# Altium PCB PCB2.PcbDoc (part 3 of 4)
Units mm, origin at the board's own origin, x right, y up, seen from the top; angles counter-clockwise.
Board outline 94 x 91 mm, 2 copper layers (Top Layer, Bottom Layer); 387 components, 398 nets, 1559 pads, 0 vias.
Unrouted connection lines stored in the file: 857.
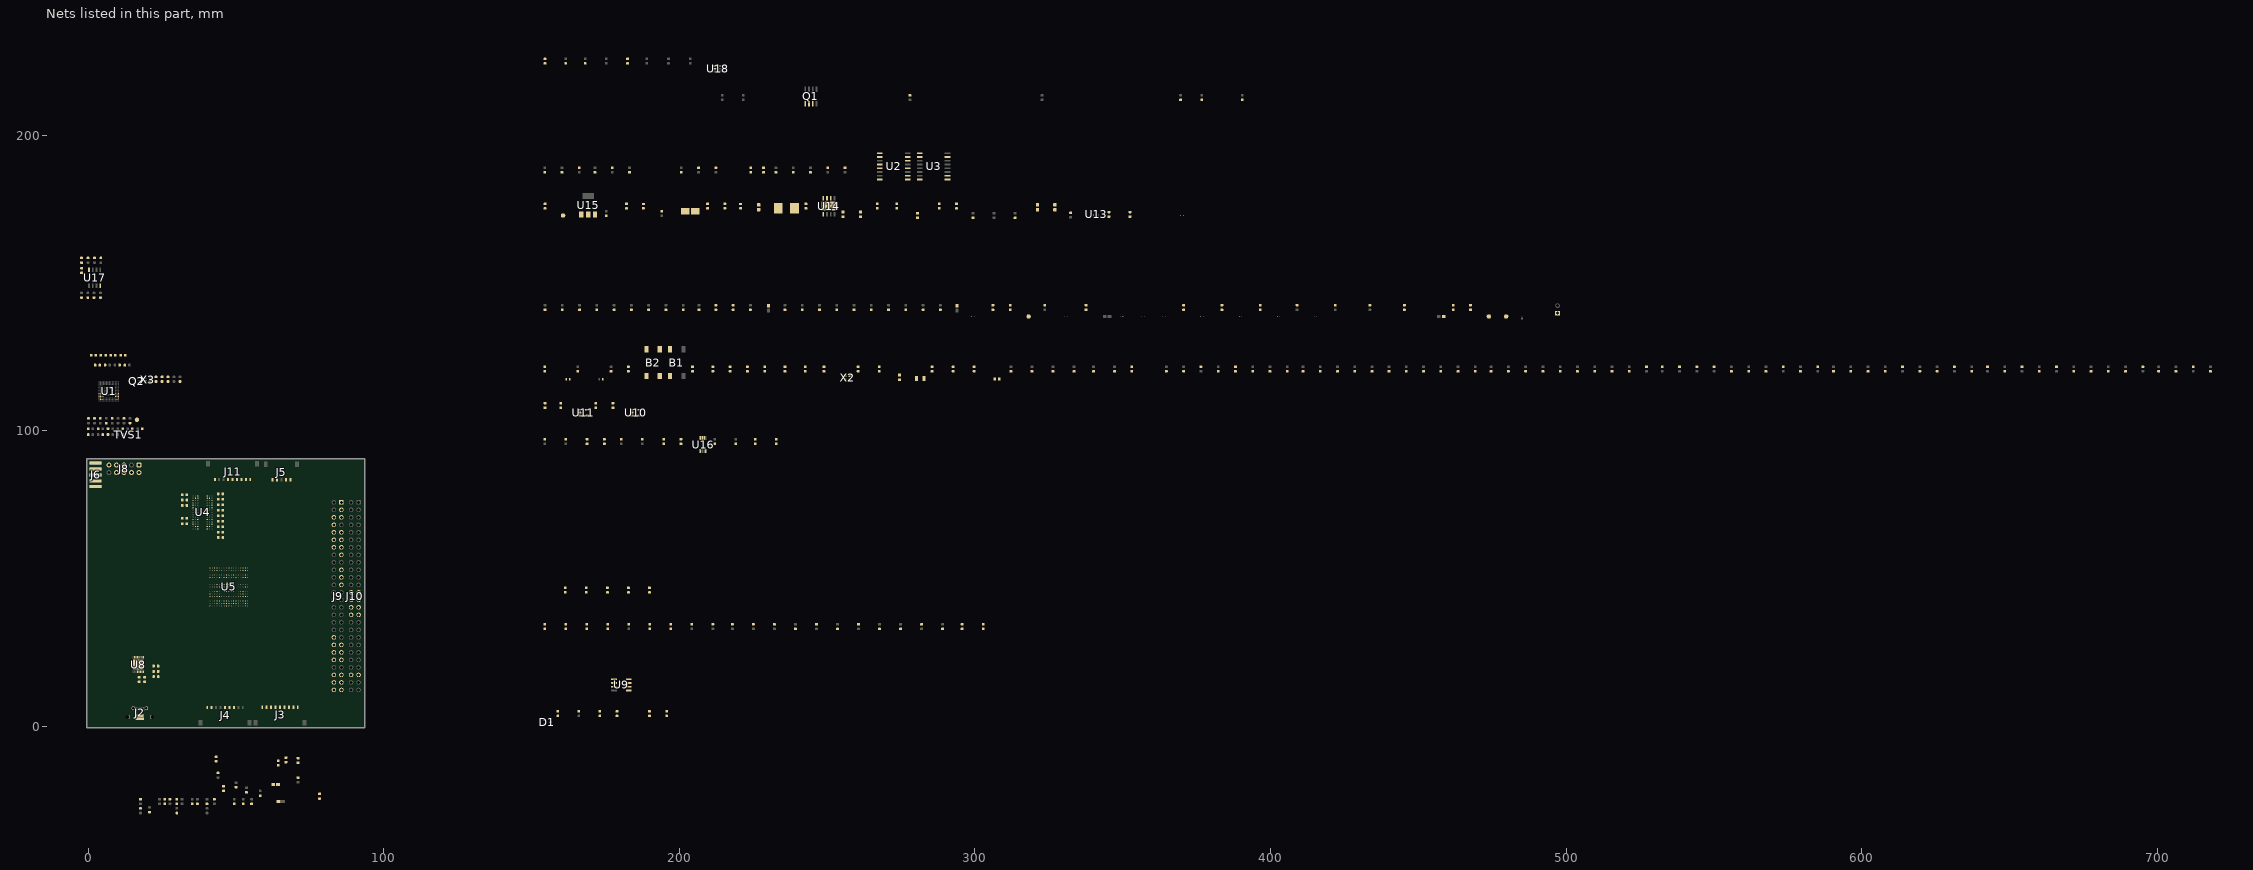
[diagram p2: the nets of this part, all layers, seen from the top]

## Part data (continued)
R1 R2 R3 R4 R5 R6 R7 R8 R17 R22: library part MCD-00063, "Resistor,47K,0402,1%,1/16W", Manufacturer=YAGEO, Manufacturer_Part_Number=RC0402FR-0747KL, Package=0402, Component_Country_Of_Origin=China, ComponentLink1Description=Yageo_Resistor_RC0402-series.pdf, ComponentLink1URL=http://tunmcdsvn.tun.st.com/Component_Documentation_Library/Trunk/Resistor/YAGEO_RC_L_Series, ECCN_EU=n/a, ECCN_US=n/a, ID=2528, Initial_Board_Reference=MB1274, Internal_Part_Number=MCD-00063, Order_Code_Digikey=311-47.0KLRCT-ND, Order_Code_Farnell=9239430, Order_Code_RS=9239430, Part_Preference=Recommended, Part_Type=Resistor, Provided_By=Subcon, ShowFields=YES, Status=Released
R9 R10 R11 R12 R13 R14 R15 R16 R20 R21 R165 R166 R167 R168 R169: library part MCD-00189, "Resistor,22R,0402,1%,1/16W", Manufacturer=YAGEO, Manufacturer_Part_Number=RC0402FR-0722RL, Package=0402, Component_Country_Of_Origin=China, ComponentLink1Description=Yageo_Resistor_RC0402-series.pdf, ComponentLink1URL=http://tunmcdsvn.tun.st.com/Component_Documentation_Library/Trunk/Resistor/YAGEO_RC_L_Series, ECCN_EU=n/a, ECCN_US=n/a, ID=2677, Internal_Part_Number=MCD-00189, Order_Code_Digikey=311-22.0LRCT-ND, Order_Code_Farnell=9239030, Order_Code_RS=N/A, Part_Preference=Recommended, Part_Type=Resistor, Provided_By=Subcon, ShowFields=YES, Status=Released
R18 R35 R36: library part MCD-00053, "Resistor,10K,0402,1%,1/16W", Manufacturer=YAGEO, Manufacturer_Part_Number=RC0402FR-0710KL, Package=0402, BMS_Part_Number=9131590, Component_Country_Of_Origin=China, ComponentLink1Description=Yageo_Resistor_RC0402-series.pdf, ComponentLink1URL=http://tunmcdsvn.tun.st.com/Component_Documentation_Library/Trunk/Resistor/YAGEO_RC_L_Series, ECCN_EU=n/a, ECCN_US=n/a, ID=2539, Initial_Board_Reference=MB1274, Internal_Part_Number=MCD-00053, Order_Code_Digikey=311-10.0KLRCT-ND, Order_Code_Farnell=9239359, Order_Code_RS=9239359, Part_Preference=Recommended, Part_Type=Resistor, Provided_By=subcon, ShowFields=YES, Status=Released
R19: library part MCD-00052, "Resistor,0R,0402,5%,1/16W", Manufacturer=YAGEO, Manufacturer_Part_Number=RC0402JR-070RL, Package=0402, Component_Country_Of_Origin=China, ComponentLink1Description=Yageo_Resistor_RC0402-series.pdf, ComponentLink1URL=http://tunmcdsvn.tun.st.com/Component_Documentation_Library/Trunk/Resistor/YAGEO_RC_L_Series, ECCN_EU=n/a, ECCN_US=n/a, ID=2540, Initial_Board_Reference=MB1274, Internal_Part_Number=MCD-00052, Order_Code_Digikey=311-0.0JRCT-ND, Order_Code_Farnell=9232516RL, Order_Code_RS=9232516RL, Part_Preference=Recommended, Part_Type=Resistor, Provided_By=Subcon, ShowFields=YES, Status=Released
R23 R24 R25 R26 R27 R28 R29 R30 R31 R32 R33 R34 R37 R38 R39 R40 R41 R42 R43 R44 R45 R46 R47 R48 R49 R50 R51 R52 R53 R54 R55 R56 R57 R58 R59 R60 R61 R62 R63 R64 R65 R66 R67 R68 R69 R70 R71 R72 R73 R74 R75 R76 R77 R78 R79 R80 R81 R82 R83 R84 R85 R86 R87 R88 R89 R90 R91 R92 R93 R94 R96 R98 R99 R100 R101 R102 R103 R104: library part MCD-00455, "Resistor,33R,0402,1%,1/16W", Manufacturer=YAGEO, Manufacturer_Part_Number=RC0402FR-0733RL, Package=0402, Component_Country_Of_Origin=China, ComponentLink1Description=Yageo_Resistor_RC0402-series.pdf, ComponentLink1URL=http://tunmcdsvn.tun.st.com/Component_Documentation_Library/Trunk/Resistor/YAGEO_RC_L_Series, ECCN_EU=n/a, ECCN_US=n/a, ID=2821, Internal_Part_Number=MCD-00455, Order_Code_Digikey=311-33.0LRCT-ND, Order_Code_Farnell=9239057, Order_Code_RS=N/A, Part_Preference=Recommended, Part_Type=Resistor, Provided_By=Subcon, ShowFields=YES, Status=Released
R95: library part MCD-00053, "Resistor,1K,0603,1%,1/16W", Manufacturer=YAGEO, Manufacturer_Part_Number=RC0402FR-0710KL, Package=0402, BMS_Part_Number=9131590, Component_Country_Of_Origin=China, ComponentLink1Description=Yageo_Resistor_RC0402-series.pdf, ComponentLink1URL=http://tunmcdsvn.tun.st.com/Component_Documentation_Library/Trunk/Resistor/YAGEO_RC_L_Series, ECCN_EU=n/a, ECCN_US=n/a, ID=2539, Initial_Board_Reference=MB1274, Internal_Part_Number=MCD-00053, Order_Code_Digikey=311-10.0KLRCT-ND, Order_Code_Farnell=9239359, Order_Code_RS=9239359, Part_Preference=Recommended, Part_Type=Resistor, Provided_By=subcon, ShowFields=YES, Status=Released
R97: library part MCD-00485, "Resistor,51R,0603,1%,1/16W", Manufacturer=YAGEO, Manufacturer_Part_Number=RC0402FR-0751RL, Package=0402, Component_Country_Of_Origin=China, ComponentLink1Description=Yageo_Resistor_RC0402-series.pdf, ComponentLink1URL=http://tunmcdsvn.tun.st.com/Component_Documentation_Library/Trunk/Resistor/YAGEO_RC_L_Series, ECCN_EU=n/a, ECCN_US=n/a, ID=2790, Internal_Part_Number=MCD-00485, Order_Code_Digikey=311-51.0LRCT-ND, Order_Code_Farnell=1458803, Order_Code_RS=N/A, Part_Preference=Recommended, Part_Type=Resistor, Provided_By=Subcon, ShowFields=YES, Status=Released
R105 R108 R162: library part _RES_B_2, "RES, 47R. 0603"
R106 R107 R117: library part MCD-00181, "Resistor,0R,0603,ULO", Manufacturer="ROHM SEMICONDUCTOR", Manufacturer_Part_Number=PMR03EZPJ000, Package=0603, Component_Country_Of_Origin="Philippines, Thailand°°", ComponentLink1Description="ROHM_ULtra low Ohmic Resistor _PMR10EZPJ000.pdf", ComponentLink1URL=http://tunmcdsvn.tun.st.com/Component_Documentation_Library/Trunk/Resistor/ROHM_PMR_Series, ECCN_EU=n/a, ECCN_US=n/a, ID=2691, Internal_Part_Number=MCD-00181, Order_Code_Digikey=PMR03EZPJ000-ND, Order_Code_Farnell=N/A, Order_Code_RS=N/A, Part_Preference=Recommended, Part_Type=Resistor, Provided_By=Subcon, ShowFields=YES, Status=Released
R109 R110 R111 R112 R113: library part MCD-00053, "Resistor,10K,0603,1%,1/16W", Manufacturer=YAGEO, Manufacturer_Part_Number=RC0402FR-0710KL, Package=0402, BMS_Part_Number=9131590, Component_Country_Of_Origin=China, ComponentLink1Description=Yageo_Resistor_RC0402-series.pdf, ComponentLink1URL=http://tunmcdsvn.tun.st.com/Component_Documentation_Library/Trunk/Resistor/YAGEO_RC_L_Series, ECCN_EU=n/a, ECCN_US=n/a, ID=2539, Initial_Board_Reference=MB1274, Internal_Part_Number=MCD-00053, Order_Code_Digikey=311-10.0KLRCT-ND, Order_Code_Farnell=9239359, Order_Code_RS=9239359, Part_Preference=Recommended, Part_Type=Resistor, Provided_By=subcon, ShowFields=YES, Status=Released
R114: library part MCD-00067, "Resistor, 100R, 0402, +/- 1%, 1/16W", Manufacturer=YAGEO, Manufacturer_Part_Number=RC0402FR-07100RL, Package=0402, Component_Country_Of_Origin=China, ComponentLink1URL=http://tunmcdsvn.tun.st.com/Component_Documentation_Library/Trunk/Resistor/YAGEO_RC_L_Series, ID=2527, Internal_Part_Number=MCD-00067, Order_Code_Digikey=311-100LRCT-ND, Order_Code_Farnell=9239111, Order_Code_RS=9239111, Part_Preference=Recommended, Part_Type=Resistor, ShowFields=YES, Status=Released
R115: library part MCD-00062, "Resistor,330R,0402,1%,1/16W", Manufacturer=YAGEO, Manufacturer_Part_Number=RC0402FR-07330RL, Package=0402, Component_Country_Of_Origin=China, ComponentLink1Description=Yageo_Resistor_RC0402-series.pdf, ComponentLink1URL=http://tunmcdsvn.tun.st.com/Component_Documentation_Library/Trunk/Resistor/YAGEO_RC_L_Series, ECCN_EU=n/a, ECCN_US=n/a, ID=2529, Initial_Board_Reference=MB1274, Internal_Part_Number=MCD-00062, Order_Code_Digikey=311-330LRCT-ND, Order_Code_Farnell=9239170, Order_Code_RS=9239170, Part_Preference=Recommended, Part_Type=Resistor, Provided_By=Subcon, ShowFields=YES, Status=Released
R116: library part MCD-00164, "Resistor,220K,0402,1%,1/16W", Manufacturer=YAGEO, Manufacturer_Part_Number=RC0402FR-07220KL, Package=0402, Component_Country_Of_Origin=China, ComponentLink1Description=Yageo_Resistor_RC0402-series.pdf, ComponentLink1URL=http://tunmcdsvn.tun.st.com/Component_Documentation_Library/Trunk/Resistor/YAGEO_RC_L_Series, ECCN_EU=n/a, ECCN_US=n/a, ID=2704, Initial_Board_Reference=MB1264, Internal_Part_Number=MCD-00164, Order_Code_Digikey=311-220KLRCT-ND, Order_Code_Farnell=9239510, Order_Code_RS=N/A, Part_Preference=Recommended, Part_Type=Resistor, Provided_By=Subcon, ShowFields=YES, Status=Released
R118 R119 R120: library part _RES_B_2, "RES, 0603"
R121 R122 R123 R124 R126 R127 R128 R129 R130 R131 R132 R133 R134 R135 R136 R137 R138 R139 R140 R141 R142 R143 R144 R145 R146 R147 R148 R149 R150 R151 R152: library part Res1, "Resistor", Published=8-Jun-2000, Publisher="Altium Limited", Revision="July-2002: Re-released for DXP Platform."
R125: library part Res_8K06_1%_0402, "Resistor,8K06,0402,1%,YAGEO", Manuf_1=YAGEO, Distrib=DIGIKEY, ECCN_US/EU=n/a
R153: library part Res1, "RES SMD OHM 1% 1/10W 0603", Published=8-Jun-2000, Publisher="Altium Limited", Revision="July-2002: Re-released for DXP Platform."
R154 R155 R163: library part MCD-00485, "Resistor,10k,0603,1%,1/16W", Manufacturer=YAGEO, Manufacturer_Part_Number=RC0402FR-0751RL, Package=0402, Component_Country_Of_Origin=China, ComponentLink1Description=Yageo_Resistor_RC0402-series.pdf, ComponentLink1URL=http://tunmcdsvn.tun.st.com/Component_Documentation_Library/Trunk/Resistor/YAGEO_RC_L_Series, ECCN_EU=n/a, ECCN_US=n/a, ID=2790, Internal_Part_Number=MCD-00485, Order_Code_Digikey=311-51.0LRCT-ND, Order_Code_Farnell=1458803, Order_Code_RS=N/A, Part_Preference=Recommended, Part_Type=Resistor, Provided_By=Subcon, ShowFields=YES, Status=Released
R156: library part MCD-00485, "Resistor,470k,0603,1%,1/16W", Manufacturer=YAGEO, Manufacturer_Part_Number=RC0402FR-0751RL, Package=0402, Component_Country_Of_Origin=China, ComponentLink1Description=Yageo_Resistor_RC0402-series.pdf, ComponentLink1URL=http://tunmcdsvn.tun.st.com/Component_Documentation_Library/Trunk/Resistor/YAGEO_RC_L_Series, ECCN_EU=n/a, ECCN_US=n/a, ID=2790, Internal_Part_Number=MCD-00485, Order_Code_Digikey=311-51.0LRCT-ND, Order_Code_Farnell=1458803, Order_Code_RS=N/A, Part_Preference=Recommended, Part_Type=Resistor, Provided_By=Subcon, ShowFields=YES, Status=Released
R157: library part MCD-00485, "Resistor,22R,0603,1%,1/16W", Manufacturer=YAGEO, Manufacturer_Part_Number=RC0402FR-0751RL, Package=0402, Component_Country_Of_Origin=China, ComponentLink1Description=Yageo_Resistor_RC0402-series.pdf, ComponentLink1URL=http://tunmcdsvn.tun.st.com/Component_Documentation_Library/Trunk/Resistor/YAGEO_RC_L_Series, ECCN_EU=n/a, ECCN_US=n/a, ID=2790, Internal_Part_Number=MCD-00485, Order_Code_Digikey=311-51.0LRCT-ND, Order_Code_Farnell=1458803, Order_Code_RS=N/A, Part_Preference=Recommended, Part_Type=Resistor, Provided_By=Subcon, ShowFields=YES, Status=Released
R158: library part MCD-00485, "Resistor,11k,0603,1%,1/16W", Manufacturer=YAGEO, Manufacturer_Part_Number=RC0402FR-0751RL, Package=0402, Component_Country_Of_Origin=China, ComponentLink1Description=Yageo_Resistor_RC0402-series.pdf, ComponentLink1URL=http://tunmcdsvn.tun.st.com/Component_Documentation_Library/Trunk/Resistor/YAGEO_RC_L_Series, ECCN_EU=n/a, ECCN_US=n/a, ID=2790, Internal_Part_Number=MCD-00485, Order_Code_Digikey=311-51.0LRCT-ND, Order_Code_Farnell=1458803, Order_Code_RS=N/A, Part_Preference=Recommended, Part_Type=Resistor, Provided_By=Subcon, ShowFields=YES, Status=Released
R159: library part MCD-00485, "Resistor,47k,0603,1%,1/16W", Manufacturer=YAGEO, Manufacturer_Part_Number=RC0402FR-0751RL, Package=0402, Component_Country_Of_Origin=China, ComponentLink1Description=Yageo_Resistor_RC0402-series.pdf, ComponentLink1URL=http://tunmcdsvn.tun.st.com/Component_Documentation_Library/Trunk/Resistor/YAGEO_RC_L_Series, ECCN_EU=n/a, ECCN_US=n/a, ID=2790, Internal_Part_Number=MCD-00485, Order_Code_Digikey=311-51.0LRCT-ND, Order_Code_Farnell=1458803, Order_Code_RS=N/A, Part_Preference=Recommended, Part_Type=Resistor, Provided_By=Subcon, ShowFields=YES, Status=Released
R160: library part MCD-00485, "Resistor,3.3k,0603,1%,1/16W", Manufacturer=YAGEO, Manufacturer_Part_Number=RC0402FR-0751RL, Package=0402, Component_Country_Of_Origin=China, ComponentLink1Description=Yageo_Resistor_RC0402-series.pdf, ComponentLink1URL=http://tunmcdsvn.tun.st.com/Component_Documentation_Library/Trunk/Resistor/YAGEO_RC_L_Series, ECCN_EU=n/a, ECCN_US=n/a, ID=2790, Internal_Part_Number=MCD-00485, Order_Code_Digikey=311-51.0LRCT-ND, Order_Code_Farnell=1458803, Order_Code_RS=N/A, Part_Preference=Recommended, Part_Type=Resistor, Provided_By=Subcon, ShowFields=YES, Status=Released
R161: library part _RES_B_2, "RES, 470R. 0603"
R164: library part MCD-00485, "Resistor,5.9k,0603,1%,1/16W", Manufacturer=YAGEO, Manufacturer_Part_Number=RC0402FR-0751RL, Package=0402, Component_Country_Of_Origin=China, ComponentLink1Description=Yageo_Resistor_RC0402-series.pdf, ComponentLink1URL=http://tunmcdsvn.tun.st.com/Component_Documentation_Library/Trunk/Resistor/YAGEO_RC_L_Series, ECCN_EU=n/a, ECCN_US=n/a, ID=2790, Internal_Part_Number=MCD-00485, Order_Code_Digikey=311-51.0LRCT-ND, Order_Code_Farnell=1458803, Order_Code_RS=N/A, Part_Preference=Recommended, Part_Type=Resistor, Provided_By=Subcon, ShowFields=YES, Status=Released
R170 R171 R172 R173 R174 R175 R176 R177 R178 R179 R180 R181 R182 R183 R184 R185 R186 R187 R188 R189 R190 R191 R192 R193 R194 R195 R196 R197 R198 R199 R200 R201 R202 R203 R204 R205 R206 R207 R208 R209 R210 R211 R212: library part _RES_B_2, "RES"
SB1 SB4 SB6 SB7 SB9 SB10 SB14 SB16 SB17 SB18: library part MCD-00071, "Solder Bridge ON", Manufacturer=YAGEO, Manufacturer_HQ_COO=Unknown, Manufacturer_Part_Number=RC0603JR-070RL, Package=0603, Component_Country_Of_Origin=China, ComponentLink1URL=http://tunmcdsvn.tun.st.com/Component_Documentation_Library/Trunk/Resistor/YAGEO_RC_Series, ECCN_EU=n/a, ECCN_US=n/a, ID=2521, Initial_Board_Reference=mb1274, Internal_Part_Number=MCD-00071, Order_Code_Digikey=311-0.0GRTR-ND, Order_Code_Farnell=2421846, Order_Code_RS=199-5647, Part_Preference=Recommended, Part_Type=Resistor, Provided_By=Subcon, ShowFields=YES, Status=Released
SB2 SB3 SB5 SB8 SB11 SB12 SB13 SB15 SB19: library part MCD-00072, "Solder Bridge OFF", Manufacturer=YAGEO, Manufacturer_HQ_COO=Unknown, Manufacturer_Part_Number=RC0603JR-070RL, Package=0603, Component_Country_Of_Origin=China, ComponentLink1URL=http://tunmcdsvn.tun.st.com/Component_Documentation_Library/Trunk/Resistor/YAGEO_RC_Series, ECCN_EU=n/a, ECCN_US=n/a, ID=2520, Initial_Board_Reference=mb1274, Internal_Part_Number=MCD-00072, Order_Code_Digikey=311-0.0GRTR-ND, Order_Code_Farnell=2421846, Order_Code_RS=199-5647, Part_Preference=Recommended, Part_Type=Resistor, Provided_By=n/a, ShowFields=YES, Status=Released
SB20: library part SB_OFF, ECCN_US/EU=n/a, Fitted=NO, Ordered by=Subcon, Revision="July-2002: Re-released for DXP Platform."
TP1 TP2 TP3 TP4 TP5: library part MCD-00630, "Test Point 0.3mm", Manufacturer=N/A, Manufacturer_HQ_COO=Unknown, Component_Country_Of_Origin=Unknown, ComponentLink1URL=http://tunmcdsvn.tun.st.com/Component_Documentation_Library/Trunk, ECCN_EU=n/a, ECCN_US=n/a, ID=3115, Initial_Board_Reference=MB1264, Internal_Part_Number=MCD-00630, Manufacturer_Part_Number=N/A, Order_Code_Digikey=N/A, Order_Code_Farnell=N/A, Order_Code_RS=N/A, Part_Preference=Recommended, Part_Type=Misc, Provided_By=n/a, ShowFields=YES, Status=Released
TVS1: "No Description Available", Manufacturer_Name=STMicroelectronics, Copyright="Copyright (C) 2025 Ultra Librarian. All rights reserved.", Manufacturer_Part_Number=USBULC6-2F3, RefDes=RefDes, Type=Type
U1: library part MCD-02799, "Memory, eMMC, 3V3, 4Gbit, 52MHz", Manufacturer=KIOXIA, Manufacturer_Part_Number=THGBMTG5D1LBAIL, Package=WFBGA153, Component_Country_Of_Origin=Unknown, ComponentLink1URL=http://tunmcdsvn.tun.st.com/Component_Documentation_Library/Trunk/IC/KIOXIA_THGBMTG5D1LBAIL, ID=4911, Internal_Part_Number=MCD-02799, Order_Code_Digikey=N/A, Order_Code_Farnell=N/A, Order_Code_RS=N/A, Part_Preference="Not recommended", Part_Type=IC, ShowFields=YES, Status=Released
U2 U3: library part MCD-01128, "Micron Serial NOR Flash Memory", Manufacturer=MICRON, Manufacturer_Part_Number=MT25QL512ABB8ESF-0SIT, Package=SOIC-16, BMS_Part_Number=9171976, Component_Country_Of_Origin=USA, ComponentLink1Description="Micron_NOR Flash_MT25QL512ABA8ESF-0SIT.pdf", ComponentLink1URL=http://tunmcdsvn.tun.st.com/Component_Documentation_Library/Trunk/IC/MICRON_MT25QL512ABB8ESF-0SIT, ECCN_EU=NEC, ECCN_US=3A991.B.1.A, ID=3369, Initial_Board_Reference=MB1381, Internal_Part_Number=MCD-01128, Order_Code_Digikey=557-1651-ND, Order_Code_Farnell=3549548, Order_Code_RS=N/A, Part_Preference=Recommended, Part_Type=IC, Provided_By=Subcon, ShowFields=YES, Status=Released
U4: library part MCD-04225, "Memory, SDRAM, 3V3, 128Mbit, 166MHz", Manufacturer=ISSI, Manufacturer_Part_Number=IS42S32400J-6BL, Package=TFBGA-90, Component_Country_Of_Origin=Unknown, ComponentLink1URL=http://tunmcdsvn.tun.st.com/Component_Documentation_Library/Trunk/IC/ISSI_IS42S32400J-6BL\, ID=6341, Internal_Part_Number=MCD-04225, Order_Code_Digikey=706-IS42S32400J-6BL-ND, Order_Code_Farnell=N/A, Order_Code_RS=N/A, Part_Preference=Recommended, Part_Type=IC, ShowFields=YES, Status=Checked
U5: library part MCD-01085, "32bit MCU TFBGA240+25", Manufacturer=STMICROELECTRONICS, Manufacturer_HQ_COO=EU, Manufacturer_Part_Number=STM32H745XIH6, Package=TFBGA-265, BMS_Part_Number=9175307, Component_Country_Of_Origin=Philippines, ComponentLink1Description=Datasheet, ComponentLink1URL=http://tunmcdsvn.tun.st.com/Component_Documentation_Library/Trunk/IC/STMICROELECTRONICS_STM32H745x, ID=3408, Initial_Board_Reference=MB1381, Internal_Part_Number=MCD-01085, Order_Code_Digikey=497-19502-ND, Order_Code_Farnell=3365366, Order_Code_RS=N/A, Part_Preference=Recommended, Part_Type=IC, Provided_By=STM, ShowFields=YES, Status=Checked
U6 U7: library part MCD-00251, "High power transient voltage suppressor, 7V breakdown", Manufacturer=STMICROELECTRONICS, Manufacturer_HQ_COO=EU, Manufacturer_Part_Number=ESDA7P60-1U1M, Package=QFN1610, BMS_Part_Number=9179042, Component_Country_Of_Origin=China, ComponentLink1Description=STM_ESD_ESDA7P60-1U1M.pdf, ComponentLink1URL=http://tunmcdsvn.tun.st.com/Component_Documentation_Library/Trunk/Diode/STMICROELECTRONICS_ESDA7P60-1U1M, ECCN_EU=NEC, ECCN_US=EAR99, ID=2618, Initial_Board_Reference=MB1311, Internal_Part_Number=MCD-00251, Order_Code_Digikey=497-16253-2-ND, Order_Code_Farnell=N/A, Order_Code_RS=110-6381, Part_Preference=Recommended, Part_Type=Diode, Provided_By=Subcon, ShowFields=YES, Status=Released
U8: "USB3320C,  Hi-Speed USB Host, Device or OTG PHY with ULPI Low Pin Interface", Manuf_1=MICROCHIP, Manuf_Part_1=USB3320C-EZK-TR, ECCN_US/EU=EAR99/NEC, Fitted=YES, Ordered by=Subcon
U10 U11: "Automotive LVDS Differential Driver"
U14: "5.5V to 36V Input, 3A, 500kHz Step-Down Converter", Package="HSOIC-8 Texas Instruments", Availability="In Stock", Check_prices=https://www.snapeda.com/parts/TPS5430DDAR/Texas+Instruments/view-part/?ref=eda, MF="Texas Instruments", MP=TPS5430DDAR, Price=None, Purchase-URL=https://pricing.snapeda.com/search/part/TPS5430DDAR/?ref=eda, SnapEDA_Link=https://www.snapeda.com/parts/TPS5430DDAR/Texas+Instruments/view-part/?ref=snap
U15: library part MCD-01070, "Adjustable and fixed low drop positive voltage regulator", Manufacturer=STMICROELECTRONICS, Manufacturer_HQ_COO=EU, Manufacturer_Part_Number=LD1117S18TR, Package=SOT-223, BMS_Part_Number=9176180, Component_Country_Of_Origin=China, ComponentLink1Description=STM_LDO_LD1117S18TR.pdf, ComponentLink1URL=http://tunmcdsvn.tun.st.com/Component_Documentation_Library/Trunk/IC/STMICROELECTRONICS_LD1117S18TR, ECCN_EU=NEC, ECCN_US=EAR99, ID=3422, Initial_Board_Reference=MB1381, Internal_Part_Number=MCD-01070, Order_Code_Digikey=497-7308-2-ND, Order_Code_Farnell=3367145, Order_Code_RS=686-9375, Part_Preference=Recommended, Part_Type=IC, Provided_By=Subcon, ShowFields=YES, Status=Checked
U16: "REDRIVER I2C HOTSWAP 8TSSOP"
U17: "No Description Available", Manufacturer_Name=ISSI, Copyright="Copyright (C) 2025 Ultra Librarian. All rights reserved.", Manufacturer_Part_Number=IS66WVS4M8BLL-104NLI, RefDes=RefDes, Type=Memory
U18: "OSC PROG TIMER TSOT23-6"
X1: library part CMP-200220-000010-1, "CRYSTAL 32.7680KHZ 12.5PF SMD", Case/Package=SMD/SMT, ESR (Equivalent Series Resistance)=70kR, Frequency=32.768kHz, Frequency Tolerance=20ppm, Load Capacitance=12.5pF, Max Operating Temperature=125°C, Min Operating Temperature=-40°C, Package Quantity=1000, Height=0.035inch, Length=0.126inch, Mount="Surface Mount", Number of Pins=2, Packaging="Tape and Reel", Width=0.059inch
X2: library part MCD-00597, "Oscillator 25.00Mhz, -+50PPM, 3.3V, Temp -55 to +125°C", Alternate_Manufacturer="AVX CORP/KYOCERA CORP", Alternate_Manufacturer_Part_Number=KC2520B25.0000C10E00, Manufacturer=NDK, Manufacturer_Part_Number=NZ2520SH-25MHZ-END4869C, Package=2.5x2.0mm, BMS_Part_Number=9157050, Component_Country_Of_Origin=Unknown, ComponentLink1Description=NDK_OSCILLATOR_NZ2520SB.pdf, ComponentLink1URL=http://tunmcdsvn.tun.st.com/Component_Documentation_Library/Trunk/Crystal_Oscillator/NDK_NZ2520SH_Series, ECCN_EU=n/a, ECCN_US=n/a, ID=3148, Initial_Board_Reference=MB1331, Internal_Part_Number=MCD-00597, Order_Code_Digikey=N/A, Order_Code_Farnell=N/A, Order_Code_RS=N/A, Part_Preference=Recommended, Part_Type=Crystal_Osc, Provided_By=STM, ShowFields=YES, Status=Released

## Nets (pads, with @x,y where several pads share a name; then routed paths per layer and width w, separated by ;. In a path a pad name is that pad's centre, name@x,y a point inside that pad or via, vN(x,y) a via of type N, cw(c..) or ccw(c..) an arc to the next point about the centre after c; other vN are vias at no path point)
1V8: C69.1 C94.2 TP5.1 U8.28 U8.30 U15.2
3.3V: C76.1 C77.1 U9.3
3V3: B2.1 B2.2 C1.2 C2.2 C3.2 C4.2 C7.2 C8.2 C9.2 C10.2 C11.2 C12.2 C13.2 C14.2 C15.2 C16.2 C17.2 C18.2 C19.2 C20.2 C21.2 C22.2 C26.2 C63.2 C64.2 C66.2 C70.1 C79.2 C80.2 C81.2 C82.2 C90.2 C91.2 C95.2 C96.2 C99.2 C101.2 DS1.1 DS2.1 J1.1 J6.6 J8.1 L2.2 Q1.1 Q1.2 Q1.3 R1.2 R2.2 R3.2 R4.2 R5.2 R6.2 R7.2 R8.2 R17.2 R18.2 R35.1 R36.1 R110.1 R111.1 R112.2 R114.2 R117.2 R136.2 R137.1 R140.1 R141.1 R154.2 R155.2 R162.2 R163.2 R170.1 R171.1 R172.1 R173.1 R200.2 R201.2 R202.2 SB18.1 U1.C6 U1.E6 U1.F5 U1.J10 U1.K9 U1.M4 U1.N4 U1.P3 U1.P5 U2.2 U3.2 U4.A7 U4.B2 U4.B7 U4.C9 U4.D9 U4.E1 U4.F9 U4.L1 U4.L7 U4.M9 U4.N9 U4.P2 U4.P7 U4.R7 U5.M1 U8.21 U10.1 U11.1 U15.3 U16.1 U16.8 U17.8 U18.1 X2.4 X3.3
3V3_BUS: J10.27 J10.28
3V3_SW1: J9.48
3V3_SW2: J9.50
3V3_SW3: J9.52
5V_BUS: J10.25 J10.26
5V_SW1: J9.47
5V_SW2: J9.49
5V_SW3: J9.51
12V: C83.1 C88.1 C89.2 R161.2 SB20.2 U13.6 U14.7
12V_CONN: C84.1 J5.1 J5.2 J11.1 R156.2 SB20.1 U13.5
+1V8: R149.1
AUXOFF: R154.1 U13.3
BOOT0: R109.1 R110.2 U5.E8
CAN0_H: J9.03 R179.2
CAN0_L: J9.01 R178.2
CAN_RX: U5.E16 U9.4
CAN_TX: U5.E17 U9.1
COMM_I2C4_EN: R176.2 U5.D3
COMM_I2C4_SCL: R174.2 U5.R16
COMM_I2C4_SDA: R175.2 U5.R17
DEBUG_UART_RX: J6.9 R169.1 U5.N4
DEBUG_UART_TX: J6.8 R167.1 U5.N5
eMMC_RSTn: R17.1 R19.2 U1.K5
FLT#: R155.1 R157.1 U13.4
FPGA_D0: U5.N6
FPGA_D1: U5.P6
FPGA_D2: U5.T6
FPGA_D3: U5.U6
FPGA_D4: U5.U7
FPGA_D5: U5.R12
FPGA_D6: U5.N15
FPGA_D7: U5.N14
FPGA_D8: U5.N13
FPGA_D9: U5.M14
FPGA_RefC: U5.E15
FPGA_STATUS0: U5.L14
FPGA_STATUS1: U5.K14
FPGA_STATUS2: U5.D11
FPGA_STATUS3: U5.E10
FPGA_STATUS4: U5.D10
FPGA_TxC: U5.N3
FPGA_TxC_N: J4.7
FPGA_TxC_P: J4.6
FPGA_TxD_N: J4.2
FPGA_TxD_P: J4.1
FRAM_CS: R203.1 U5.T4
FRAM_SPI6_MISO: R206.1 U5.R3
FRAM_SPI6_MOSI: R205.1 U5.R5
FRAM_SPI6_SCK: R204.1 U5.D9
GND: B1.1 B1.2 C1.1 C2.1 C3.1 C4.1 C5.1 C6.1 C7.1 C8.1 C9.1 C10.1 C11.1 C12.1 C13.1 C14.1 C15.1 C16.1 C17.1 C18.1 C19.1 C20.1 C21.1 C22.1 C23.1 C24.1 C25.1 C26.1 C28.1 C35.1 C36.1 C37.1 C38.1 C39.1 C40.1 C41.2 C42.1 C43.1 C44.1 C45.1 C46.1 C47.1 C48.1 C49.1 C50.1 C51.1 C52.2 C53.1 C54.1 C55.1 C56.1 C57.1 C58.1 C59.1 C60.1 C61.1 C62.1 C63.1 C64.1 C65.1 C66.1 C67.2 C68.1 C69.2 C70.2 C71.2 C72.2 C73.2 C74.2 C75.2 C76.2 C77.2 C78.2 C79.1 C80.1 C81.1 C82.1 C83.2 C84.2 C85.1 C86.1 C88.2 C91.1 C92.1 C93.1 C94.1 C97.1 C98.1 C100.1 C102.1 D1.3 D2.1 DS3.2 DS4.2 FB4.1 J3.5 J4.5 J5.4 J5.5 J6.10 J8.9 J10.29 J10.30 J10.31 J10.32 J10.47 J10.48 J11.2 Q2.2 R22.2 R109.2 R113.1 R116.1 R125.2 R139.2 R146.2 R147.2 R148.2 R150.2 R153.2 R159.1 R160.1 R164.1 R177.2 R211.1 R212.1 SB6.2 TP2.1 TP3.1 TVS1.B1 TVS1.B2 U1.A6 U1.C4 U1.E7 U1.G5 U1.H10 U1.J5 U1.K8 U1.N2 U1.N5 U1.P4 U1.P6 U2.10 U3.10 U4.A3 U4.B3 U4.B8 U4.C1 U4.D1 U4.E9 U4.F1 U4.L3 U4.L9 U4.M1 U4.N1 U4.P3 U4.P8 U4.R3 U5.A1 U5.A17 U5.B2 U5.C10 U5.C13 U5.G7 U5.G8 U5.G9 U5.G10 U5.G11 U5.G16 U5.H7 U5.H8 U5.H9 U5.H10 U5.H11 U5.J3 U5.J7 U5.J8 U5.J9 U5.J10 U5.J11 U5.J16 U5.J17 U5.K7 U5.K8 U5.K9 U5.K10 U5.K11 U5.K15 U5.L7 U5.L8 U5.L9 U5.L10 U5.L11 U5.L15 U5.M15 U5.N1 U5.N16 U5.P1 U5.R4 U5.R8 U5.U1 U5.U17 U6.2 U7.2 U8.33 U9.2 U10.2 U11.2 U13.8 U14.6 U14.9 U15.1 U16.4 U17.4 U18.2 X2.2 X3.2
GND-SD: C29.1 C30.1 C31.1 C32.2 C33.2 C34.2 SB6.1 U5.B6 U5.C16 U5.F2 U5.T12
I2C0_SCL: J9.40 R195.1
I2C0_SDA: J9.38 R193.1
I2C1_SCL: J9.43 R198.2
I2C1_SDA: J9.41 R196.2
I2C2_SCL: J9.44 R199.1
I2C2_SDA: J9.42 R197.1
JTCK/SWCLK: J6.2 R166.2 U5.B14
JTDI: J6.4 J8.8 U5.A14
JTDO/SWO: J6.1 R165.2 U5.C6
JTMS/SWDO: J6.3 R168.2 U5.C15
K_IN: U5.B10
LED1: R105.2 U5.D2
LED2: R108.2 U5.A9
LVDS_RxC_N: J3.9
LVDS_RxC_P: J3.8
LVDS_RxD_N: J3.4
LVDS_RxD_P: J3.3
LVDS_SPI_MOSI: U5.E5 U10.5
LVDS_SPI_SCK: U5.C3 U11.5
LVDS_TxC_N: J3.7 U11.3
LVDS_TxC_P: J3.6 U11.4
LVDS_TxD_N: J3.2 U10.3
LVDS_TxD_P: J3.1 U10.4
NC: J6.5
NetB2_3: B2.3 B2.4 C27.1 R115.1 R116.2 U7.1
NetC5_2: C5.2 C6.2 U1.C2
NetC23_2: C23.2 R95.2 U5.K4
NetC24_2: C24.2 R106.2 X1.1
NetC25_2: C25.2 R107.2 X1.2
NetC27_2: C27.2 R114.1
NetC29_2: C29.2 FB1.1 U5.F1
NetC30_2: C30.2 L1.2 U5.E1
NetC31_2: C31.2 SB7.1
NetC35_2: C35.2 SB11.1
NetC36_2: C36.2 SB12.1
NetC37_2: C37.2 SB13.1
NetC38_2: C38.2 SB16.2 U5.F17 U5.G17
NetC39_2: C39.2 C40.2 TP4.1 U5.N17
NetC67_1: C67.1 C68.2 U8.20 U8.23
NetC71_1: C71.1 C72.1 C73.1 C74.1 FB4.2 J2.5 J2.6 J2.7 J2.8 J2.9 J2.10
NetC78_1: C78.1 R151.2 R152.1 U9.5
NetC85_2: C85.2 U13.10
NetC86_2: C86.2 U13.7
NetC87_1: C87.1 D2.2 L2.1 U14.8
NetC87_2: C87.2 U14.1
NetC89_1: C89.1 C92.2
NetC90_1: C90.1 C93.2
NetC95_1: C95.1 C97.2
NetC96_1: C96.1 C98.2
NetC99_1: C99.1 C100.2
NetC101_1: C101.1 C102.2
NetD1_1: D1.1 J11.3 R151.1 R179.1 U9.7
NetD1_2: D1.2 J11.4 R152.2 R178.1 U9.6
NetDS1_2: DS1.2 R105.1
NetDS2_2: DS2.2 R108.1
NetDS3_1: DS3.1 R161.1
NetDS4_1: DS4.1 R162.1
NetFB3_1: FB3.1 R126.1
NetJ8_2: J8.2 R165.1
NetJ8_4: J8.4 R166.1
NetJ8_5: J8.5 R167.2
NetJ8_6: J8.6 R168.1
NetJ8_7: J8.7 R169.2
NetJ9_05: J9.05 R180.2
NetJ9_06: J9.06 R181.1
NetJ9_08: J9.08 R182.1
NetJ9_09: J9.09 R183.2
NetJ9_10: J9.10 R184.1
NetJ9_11: J9.11 R185.2
NetJ9_12: J9.12 R186.1
NetJ9_13: J9.13 R187.2
NetJ9_14: J9.14 R188.1
NetJ9_15: J9.15 R189.2
NetJ9_19: J9.19 R190.2
NetJ9_21: J9.21 R191.2
NetJ9_23: J9.23 R192.2
NetJ9_39: J9.39 R194.2
NetJ11_5: J11.5 R173.2 R195.2 R198.1 R199.2 U16.7
NetJ11_6: J11.6 R172.2 R193.2 R196.1 R197.2 U16.6
NetJ11_9: J11.9 R118.2
NetQ2_1: Q2.1 R149.2 R150.1
NetR9_2: R9.2 U1.A3
NetR10_2: R10.2 U1.A4
NetR11_2: R11.2 U1.A5
NetR12_2: R12.2 U1.B2
NetR13_2: R13.2 U1.B3
NetR14_2: R14.2 U1.B4
NetR15_2: R15.2 U1.B5
NetR16_2: R16.2 U1.B6
NetR20_2: R20.2 U1.M6
NetR21_2: R21.2 U1.M5
NetR22_1: R22.1 TP1.1 U1.H5
NetR23_2: R23.2 U2.1
NetR24_2: R24.2 U3.1
NetR25_1: R25.1 U2.15
NetR26_1: R26.1 U3.15
NetR27_1: R27.1 U2.14
NetR28_2: R28.2 U2.4
NetR29_2: R29.2 U2.5
NetR30_1: R30.1 U2.12
NetR31_2: R31.2 U2.8
NetR32_1: R32.1 U2.9
NetR33_2: R33.2 U3.8
NetR34_1: R34.1 U3.9
NetR37_1: R37.1 U5.D13
NetR38_2: R38.2 U5.T8
NetR39_1: R39.1 U5.A16
NetR40_1: R40.1 U5.E12
NetR41_2: R41.2 U5.U8
NetR42_1: R42.1 U5.A15
NetR43_1: R43.1 U5.B15
NetR44_1: R44.1 U5.C14
NetR45_2: R45.2 U5.H14
NetR46_1: R46.1 U5.A4
NetR47_2: R47.2 U5.G14
NetR48_1: R48.1 U5.A3
NetR49_2: R49.2 U5.G15
NetR50_1: R50.1 U5.A2
NetR51_1: R51.1 U5.B3
NetR52_1: R52.1 U5.U16
NetR53_2: R53.2 U5.F15
NetR54_1: R54.1 U5.T17
NetR55_2: R55.2 U5.A10
NetR56_1: R56.1 U5.E2
NetR57_1: R57.1 U5.T16
NetR58_1: R58.1 U5.F3
NetR59_1: R59.1 U5.R15
NetR60_1: R60.1 U5.P16
NetR61_2: R61.2 U5.D8
NetR62_1: R62.1 U5.P15
NetR63_2: R63.2 U5.D6
NetR64_1: R64.1 U5.C4
NetR65_1: R65.1 U5.B4
NetR66_2: R66.2 U5.N2
NetR67_2: R67.2 U5.P2
NetR68_2: R68.2 U5.P4
NetR69_2: R69.2 U5.T11
NetR70_1: R70.1 U5.U9
NetR71_2: R71.2 U5.U13
NetR72_1: R72.1 U5.T9
NetR73_1: R73.1 U5.T13
NetR74_1: R74.1 U5.P9
NetR75_1: R75.1 U5.R13
NetR76_1: R76.1 U5.N9
NetR77_1: R77.1 U5.P13
NetR78_1: R78.1 U5.P10
NetR79_1: R79.1 U5.P14
NetR80_1: R80.1 U5.R10
NetR81_1: R81.1 U5.R14
NetR82_1: R82.1 U5.T10
NetR83_1: R83.1 U5.D16
NetR84_1: R84.1 U5.U10
NetR85_1: R85.1 U5.B17
NetR86_1: R86.1 U5.R11
NetR87_1: R87.1 U5.B16
NetR88_1: R88.1 U5.G4
NetR89_1: R89.1 U5.G3
NetR90_1: R90.1 U5.G1
NetR91_1: R91.1 U5.H4
NetR92_1: R92.1 U5.J5
NetR93_1: R93.1 U5.J4
NetR94_1: R94.1 U5.K2
NetR95_1: R95.1 R160.2 U13.9
NetR96_1: R96.1 U5.K3
NetR97_2: R97.2 U5.J2
NetR98_1: R98.1 U5.L4
NetR99_1: R99.1 U5.L3
NetR100_1: R100.1 U5.T7
NetR101_1: R101.1 U5.R7
NetR102_1: R102.1 U5.P7
NetR103_1: R103.1 U5.P8
NetR104_1: R104.1 U5.R9
NetR106_1: R106.1 U5.C2
NetR107_1: R107.1 U5.C1
NetR111_2: R111.2 R113.2 U5.E7
NetR112_1: R112.1 X2.1
NetR120_2: R120.2
NetR121_1: R121.1 U8.2
NetR122_1: R122.1 U8.31
NetR123_1: R123.1 U8.29
NetR124_1: R124.1 U8.1
NetR125_1: R125.1 U8.24
NetR126_2: R126.2 U8.22
NetR127_1: R127.1 U8.13
NetR128_1: R128.1 U8.10
NetR129_1: R129.1 U8.9
NetR130_1: R130.1 U8.7
NetR131_1: R131.1 U8.6
NetR132_1: R132.1 U8.5
NetR133_1: R133.1 U8.4